# EAGLE board Qwiic_High_Performance_Magnetometer-Panel (EAGLE 9.6.2), part 1 of 3
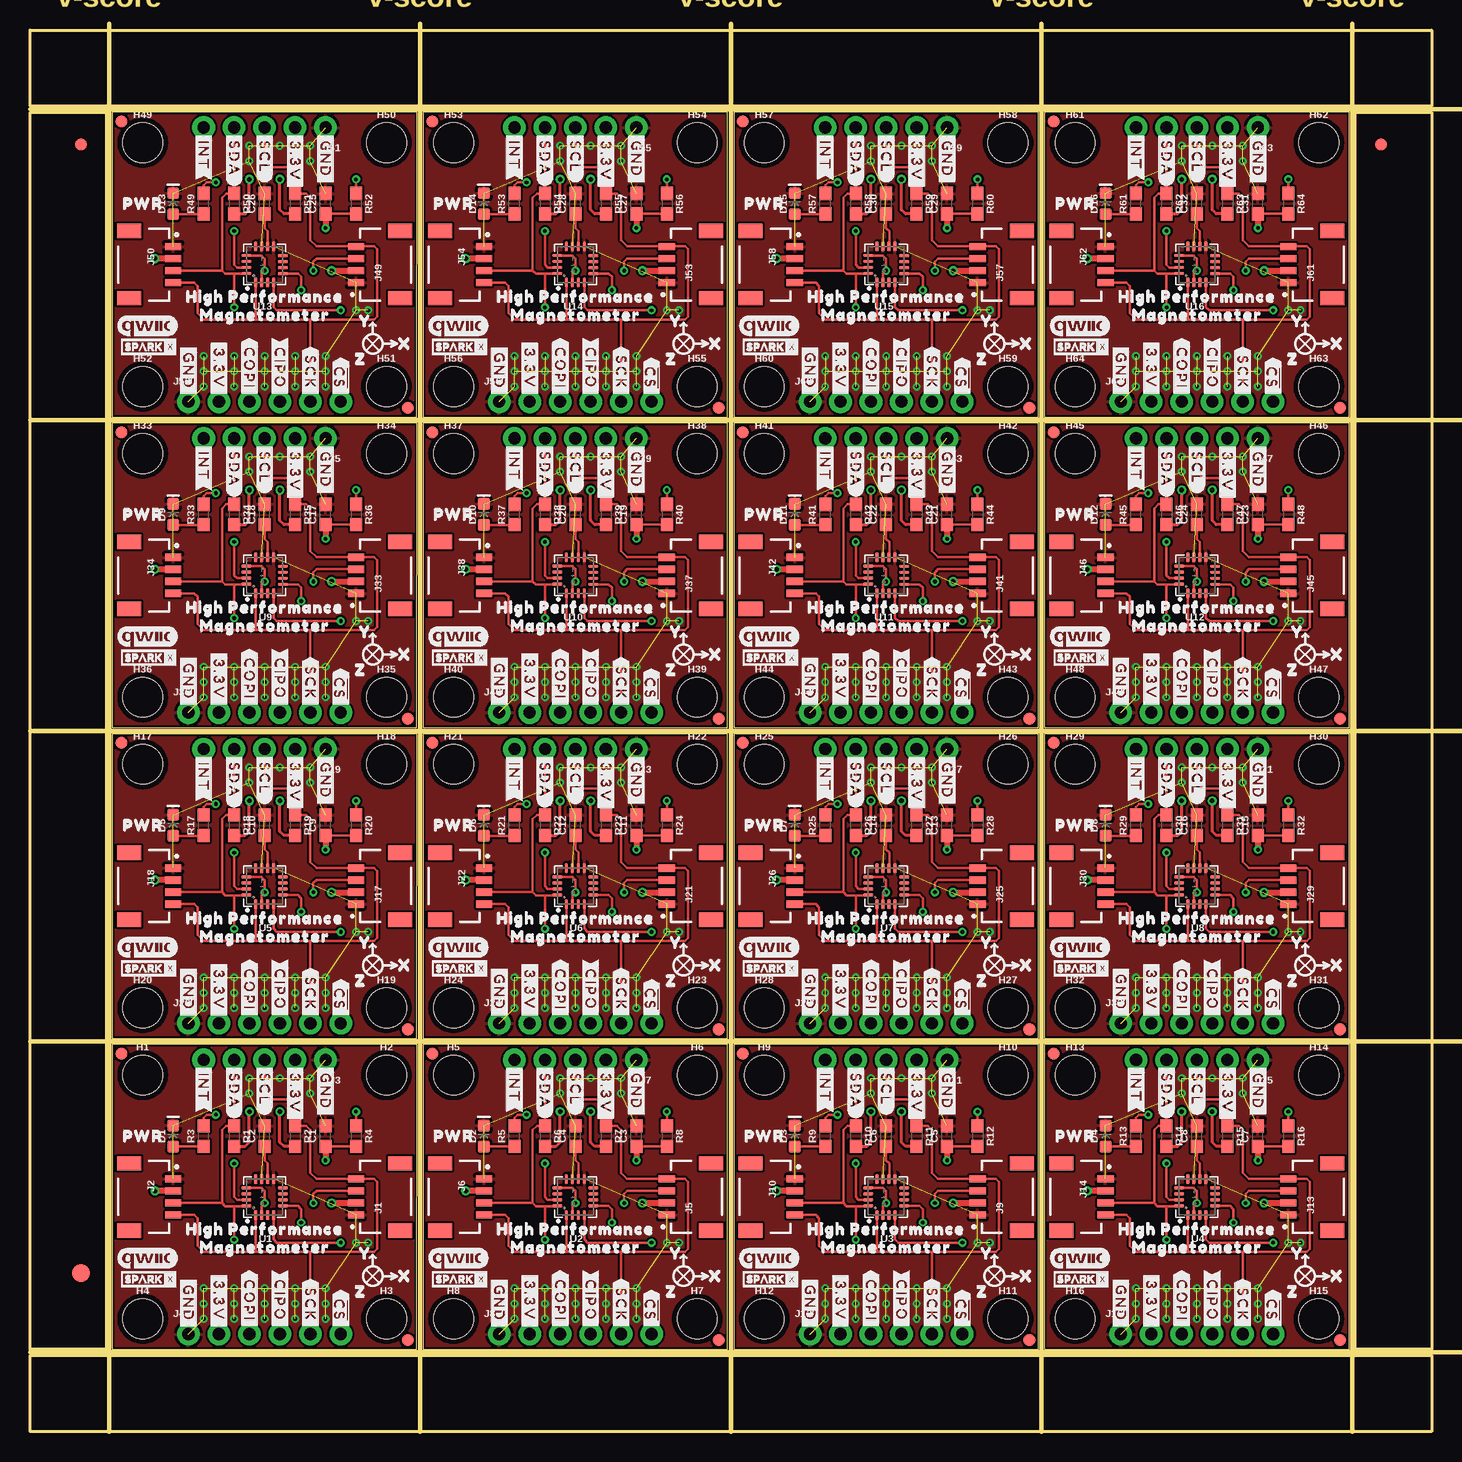
[diagram p0: board, top side]
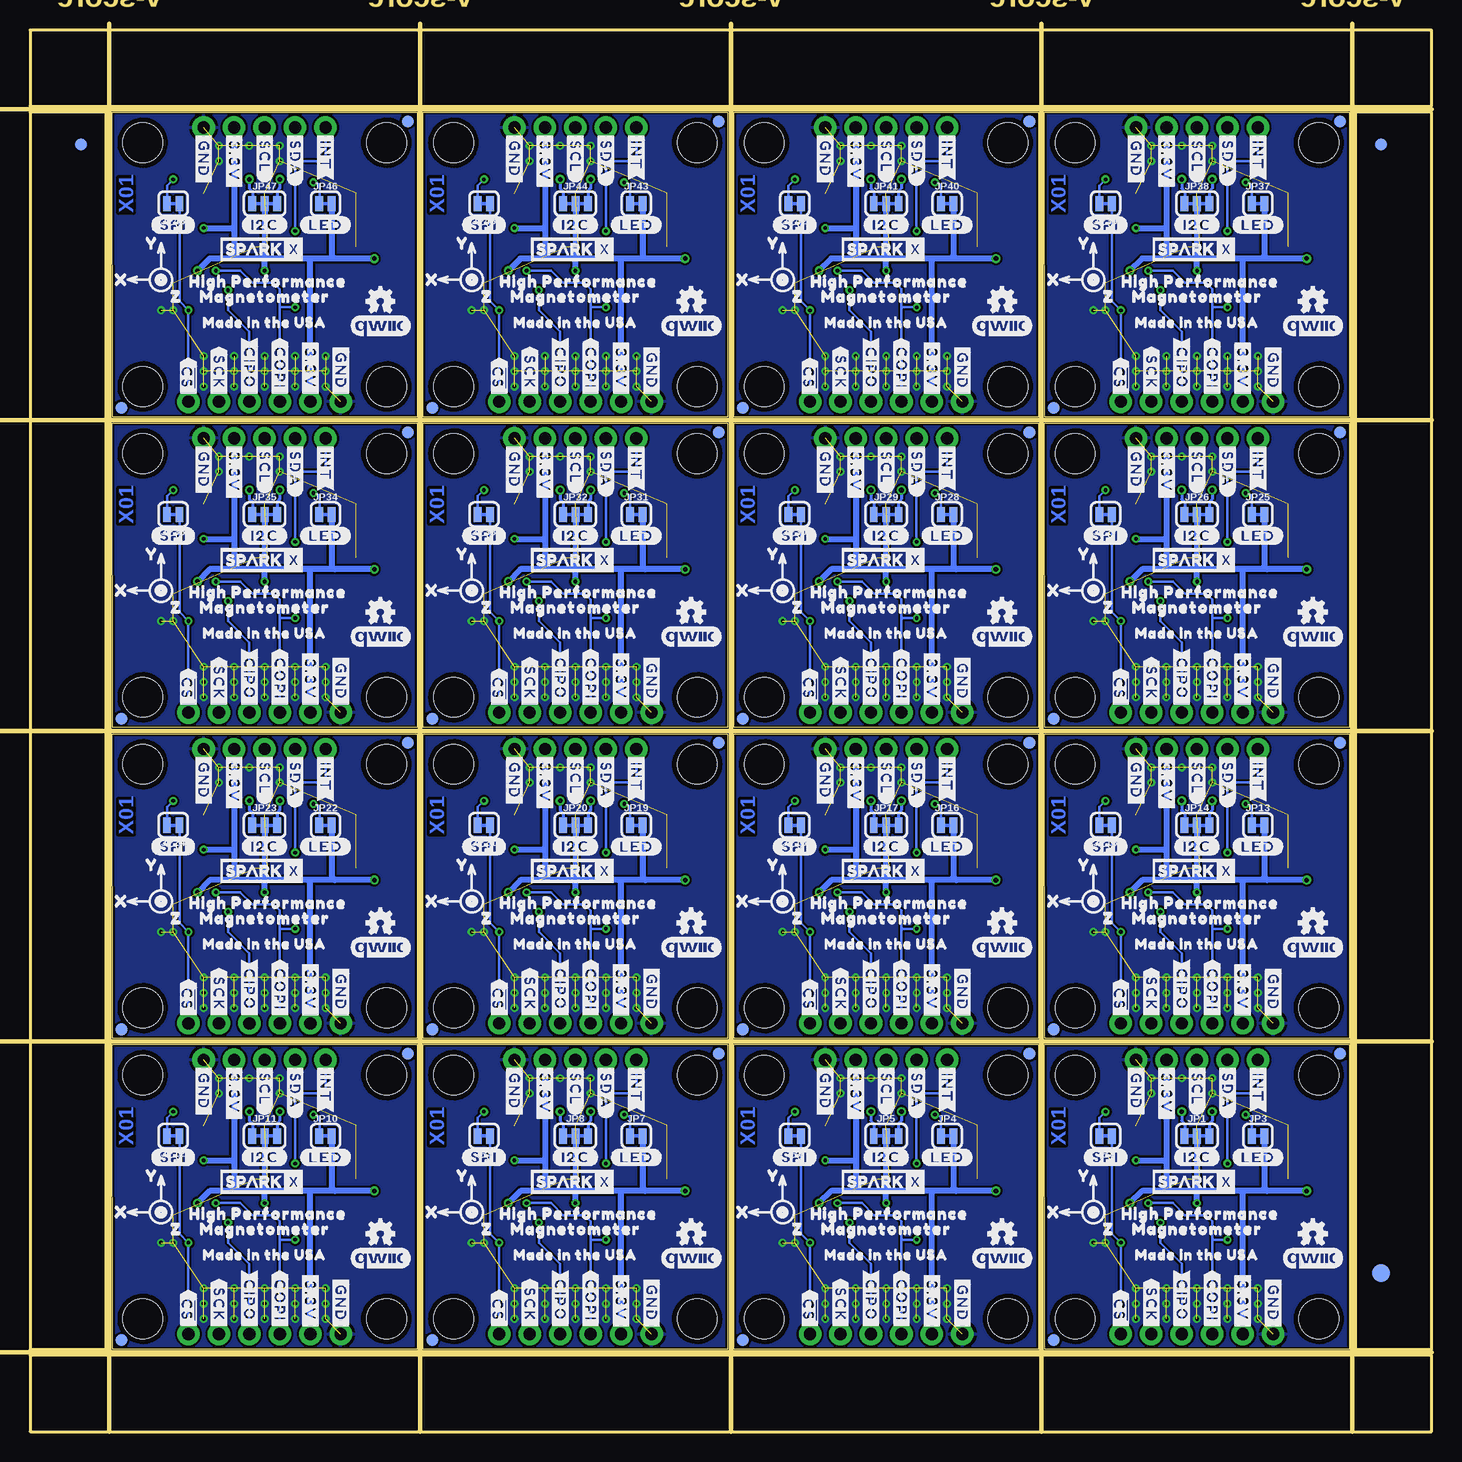
[diagram p1: board, bottom side, seen from below]

Size 116.84 x 116.84 mm. Coordinates in mm from the lower left corner, seen from the top.
Outline: 6.86,6.86 32.24,6.86 32.26,32.26 6.86,32.26 6.86,6.86
Outline: 32.77,6.86 58.15,6.86 58.17,32.26 32.77,32.26 32.77,6.86
Outline: 58.67,6.86 84.05,6.86 84.07,32.26 58.67,32.26 58.67,6.86
Outline: 84.58,6.86 109.96,6.86 109.98,32.26 84.58,32.26 84.58,6.86
Outline: 6.86,32.77 32.24,32.77 32.26,58.17 6.86,58.17 6.86,32.77
Outline: 32.77,32.77 58.15,32.77 58.17,58.17 32.77,58.17 32.77,32.77
Outline: 58.67,32.77 84.05,32.77 84.07,58.17 58.67,58.17 58.67,32.77
Outline: 84.58,32.77 109.96,32.77 109.98,58.17 84.58,58.17 84.58,32.77
Outline: 6.86,58.67 32.24,58.67 32.26,84.07 6.86,84.07 6.86,58.67
Outline: 32.77,58.67 58.15,58.67 58.17,84.07 32.77,84.07 32.77,58.67
Outline: 58.67,58.67 84.05,58.67 84.07,84.07 58.67,84.07 58.67,58.67
Outline: 84.58,58.67 109.96,58.67 109.98,84.07 84.58,84.07 84.58,58.67
Outline: 6.86,84.58 32.24,84.58 32.26,109.98 6.86,109.98 6.86,84.58
Outline: 32.77,84.58 58.15,84.58 58.17,109.98 32.77,109.98 32.77,84.58
Outline: 58.67,84.58 84.05,84.58 84.07,109.98 58.67,109.98 58.67,84.58
Outline: 84.58,84.58 109.96,84.58 109.98,109.98 84.58,109.98 84.58,84.58
Outline: 0,6.35 116.84,6.35 116.84,0 0,0 0,6.35
Outline: 110.49,109.98 116.84,109.98 116.84,6.86 110.49,6.86 110.49,109.98
Outline: 0,116.84 116.84,116.84 116.84,110.49 0,110.49 0,116.84
Outline: 0,109.98 6.35,109.98 6.35,6.86 0,6.86 0,109.98
Copper layers (1*16): Top 0.035mm / dielectric 1.5mm / Bottom 0.035mm
Design rules "Qwiic_High_Performance_Magnetometer": minimum track width 7mil, minimum drill 0.3mm, track to track 7mil, track to pad 7mil, pad to pad 7mil, via to via 7mil, smd to smd 7mil, copper to edge 7mil, drill to drill 7mil, minimum pad ring 7mil, minimum via ring 7mil, stop-mask expansion 4mil, vias tented up to drill 25mil, thermal gap 10mil
Milling: 10 lines

## Footprints (pad centres in the part's own frame; a part is rotated, then mirrored left to right if it is on the bottom)
0603 = smd 1.1 x 1: 1 -0.85,0; 2 0.85,0
LED-0603 = smd 1 x 1: A -0.877,0; C 0.877,0
FIDUCIAL-1X2 = smd 1 x 1: 1 0,0
FIDUCIAL-1.5X3 = smd 1.5 x 1.5: 1 0,0
STAND-OFF = hole 3.302: 0,0
JST04_1MM_RA = smd 0.6 x 1.35: 1 -1.5,0; 2 -0.5,0; 3 0.5,0; 4 1.5,0 | smd 1.2 x 2: NC1 2.8,-3.675; NC2 -2.8,-3.675
1X05_NO_SILK = drill 1.016 pad 1.88: 1 0,0; 2 2.54,0; 3 5.08,0; 4 7.62,0; 5 10.16,0
1X06_NO_SILK = drill 1.016 pad 1.88: 1 0,0; 2 2.54,0; 3 5.08,0; 4 7.62,0; 5 10.16,0; 6 12.7,0
SMT-JUMPER_3_2-NC_TRACE_SILK = smd 0.66 x 1.27: 1 -1.041,0; 2 0,0; 3 1.041,0
SMT-JUMPER_2_NC_TRACE_SILK = smd 0.66 x 1.27: 1 -0.521,0; 2 0.521,0
LGA-16-3X3MM-4X4PINS = smd 0.3 x 0.85: 1 0.754,1.498; 2 0.254,1.498; 3 -0.246,1.498; 4 -0.746,1.498; 9 -0.746,-1.506; 10 -0.246,-1.506; 11 0.254,-1.506; 12 0.754,-1.506 | smd 0.85 x 0.3: 5 -1.508,0.746; 6 -1.508,0.246; 7 -1.508,-0.254; 8 -1.508,-0.754; 13 1.496,-0.764; 14 1.496,-0.264; 15 1.496,0.236; 16 1.496,0.736

## Placement (x,y rotation side)
C1  0.1uF  [0603]  24.64,24.64 90 top
C2  10uF  [0603]  19.56,24.64 90 top
C3  0.1uF  [0603]  50.55,24.64 90 top
C4  10uF  [0603]  45.47,24.64 90 top
C5  0.1uF  [0603]  76.45,24.64 90 top
C6  10uF  [0603]  71.37,24.64 90 top
C7  0.1uF  [0603]  102.36,24.64 90 top
C8  10uF  [0603]  97.28,24.64 90 top
C9  0.1uF  [0603]  24.64,50.55 90 top
C10  10uF  [0603]  19.56,50.55 90 top
C11  0.1uF  [0603]  50.55,50.55 90 top
C12  10uF  [0603]  45.47,50.55 90 top
C13  0.1uF  [0603]  76.45,50.55 90 top
C14  10uF  [0603]  71.37,50.55 90 top
C15  0.1uF  [0603]  102.36,50.55 90 top
C16  10uF  [0603]  97.28,50.55 90 top
C17  0.1uF  [0603]  24.64,76.45 90 top
C18  10uF  [0603]  19.56,76.45 90 top
C19  0.1uF  [0603]  50.55,76.45 90 top
C20  10uF  [0603]  45.47,76.45 90 top
C21  0.1uF  [0603]  76.45,76.45 90 top
C22  10uF  [0603]  71.37,76.45 90 top
C23  0.1uF  [0603]  102.36,76.45 90 top
C24  10uF  [0603]  97.28,76.45 90 top
C25  0.1uF  [0603]  24.64,102.36 90 top
C26  10uF  [0603]  19.56,102.36 90 top
C27  0.1uF  [0603]  50.55,102.36 90 top
C28  10uF  [0603]  45.47,102.36 90 top
C29  0.1uF  [0603]  76.45,102.36 90 top
C30  10uF  [0603]  71.37,102.36 90 top
C31  0.1uF  [0603]  102.36,102.36 90 top
C32  10uF  [0603]  97.28,102.36 90 top
D1  RED  [LED-0603]  11.94,24.64 90 top
D2  RED  [LED-0603]  37.85,24.64 90 top
D3  RED  [LED-0603]  63.75,24.64 90 top
D4  RED  [LED-0603]  89.66,24.64 90 top
D5  RED  [LED-0603]  11.94,50.55 90 top
D6  RED  [LED-0603]  37.85,50.55 90 top
D7  RED  [LED-0603]  63.75,50.55 90 top
D8  RED  [LED-0603]  89.66,50.55 90 top
D9  RED  [LED-0603]  11.94,76.45 90 top
D10  RED  [LED-0603]  37.85,76.45 90 top
D11  RED  [LED-0603]  63.75,76.45 90 top
D12  RED  [LED-0603]  89.66,76.45 90 top
D13  RED  [LED-0603]  11.94,102.36 90 top
D14  RED  [LED-0603]  37.85,102.36 90 top
D15  RED  [LED-0603]  63.75,102.36 90 top
D16  RED  [LED-0603]  89.66,102.36 90 top
E$1  [FIDUCIAL-1X2]  4.23,107.31 0 top
E$2  [FIDUCIAL-1X2]  4.23,107.31 0 bottom
E$3  [FIDUCIAL-1X2]  112.61,107.31 0 top
E$4  [FIDUCIAL-1X2]  112.61,107.31 0 bottom
E$5  [FIDUCIAL-1.5X3]  4.23,13.21 0 top
E$6  [FIDUCIAL-1.5X3]  4.23,13.21 0 bottom
FD1  FIDUCIAL1X2  [FIDUCIAL-1X2]  31.5,7.62 0 top
FD2  FIDUCIAL1X2  [FIDUCIAL-1X2]  7.62,31.5 0 top
FD3  FIDUCIAL1X2  [FIDUCIAL-1X2]  7.62,31.5 0 bottom
FD4  FIDUCIAL1X2  [FIDUCIAL-1X2]  31.5,7.62 0 bottom
FD5  FIDUCIAL1X2  [FIDUCIAL-1X2]  57.4,7.62 0 top
FD6  FIDUCIAL1X2  [FIDUCIAL-1X2]  33.53,31.5 0 top
FD7  FIDUCIAL1X2  [FIDUCIAL-1X2]  33.53,31.5 0 bottom
FD8  FIDUCIAL1X2  [FIDUCIAL-1X2]  57.4,7.62 0 bottom
FD9  FIDUCIAL1X2  [FIDUCIAL-1X2]  83.31,7.62 0 top
FD10  FIDUCIAL1X2  [FIDUCIAL-1X2]  59.44,31.5 0 top
FD11  FIDUCIAL1X2  [FIDUCIAL-1X2]  59.44,31.5 0 bottom
FD12  FIDUCIAL1X2  [FIDUCIAL-1X2]  83.31,7.62 0 bottom
FD13  FIDUCIAL1X2  [FIDUCIAL-1X2]  109.22,7.62 0 top
FD14  FIDUCIAL1X2  [FIDUCIAL-1X2]  85.34,31.5 0 top
FD15  FIDUCIAL1X2  [FIDUCIAL-1X2]  85.34,31.5 0 bottom
FD16  FIDUCIAL1X2  [FIDUCIAL-1X2]  109.22,7.62 0 bottom
FD17  FIDUCIAL1X2  [FIDUCIAL-1X2]  31.5,33.53 0 top
FD18  FIDUCIAL1X2  [FIDUCIAL-1X2]  7.62,57.4 0 top
FD19  FIDUCIAL1X2  [FIDUCIAL-1X2]  7.62,57.4 0 bottom
FD20  FIDUCIAL1X2  [FIDUCIAL-1X2]  31.5,33.53 0 bottom
FD21  FIDUCIAL1X2  [FIDUCIAL-1X2]  57.4,33.53 0 top
FD22  FIDUCIAL1X2  [FIDUCIAL-1X2]  33.53,57.4 0 top
FD23  FIDUCIAL1X2  [FIDUCIAL-1X2]  33.53,57.4 0 bottom
FD24  FIDUCIAL1X2  [FIDUCIAL-1X2]  57.4,33.53 0 bottom
FD25  FIDUCIAL1X2  [FIDUCIAL-1X2]  83.31,33.53 0 top
FD26  FIDUCIAL1X2  [FIDUCIAL-1X2]  59.44,57.4 0 top
FD27  FIDUCIAL1X2  [FIDUCIAL-1X2]  59.44,57.4 0 bottom
FD28  FIDUCIAL1X2  [FIDUCIAL-1X2]  83.31,33.53 0 bottom
FD29  FIDUCIAL1X2  [FIDUCIAL-1X2]  109.22,33.53 0 top
FD30  FIDUCIAL1X2  [FIDUCIAL-1X2]  85.34,57.4 0 top
FD31  FIDUCIAL1X2  [FIDUCIAL-1X2]  85.34,57.4 0 bottom
FD32  FIDUCIAL1X2  [FIDUCIAL-1X2]  109.22,33.53 0 bottom
FD33  FIDUCIAL1X2  [FIDUCIAL-1X2]  31.5,59.44 0 top
FD34  FIDUCIAL1X2  [FIDUCIAL-1X2]  7.62,83.31 0 top
FD35  FIDUCIAL1X2  [FIDUCIAL-1X2]  7.62,83.31 0 bottom
FD36  FIDUCIAL1X2  [FIDUCIAL-1X2]  31.5,59.44 0 bottom
FD37  FIDUCIAL1X2  [FIDUCIAL-1X2]  57.4,59.44 0 top
FD38  FIDUCIAL1X2  [FIDUCIAL-1X2]  33.53,83.31 0 top
FD39  FIDUCIAL1X2  [FIDUCIAL-1X2]  33.53,83.31 0 bottom
FD40  FIDUCIAL1X2  [FIDUCIAL-1X2]  57.4,59.44 0 bottom
FD41  FIDUCIAL1X2  [FIDUCIAL-1X2]  83.31,59.44 0 top
FD42  FIDUCIAL1X2  [FIDUCIAL-1X2]  59.44,83.31 0 top
FD43  FIDUCIAL1X2  [FIDUCIAL-1X2]  59.44,83.31 0 bottom
FD44  FIDUCIAL1X2  [FIDUCIAL-1X2]  83.31,59.44 0 bottom
FD45  FIDUCIAL1X2  [FIDUCIAL-1X2]  109.22,59.44 0 top
FD46  FIDUCIAL1X2  [FIDUCIAL-1X2]  85.34,83.31 0 top
FD47  FIDUCIAL1X2  [FIDUCIAL-1X2]  85.34,83.31 0 bottom
FD48  FIDUCIAL1X2  [FIDUCIAL-1X2]  109.22,59.44 0 bottom
FD49  FIDUCIAL1X2  [FIDUCIAL-1X2]  31.5,85.34 0 top
FD50  FIDUCIAL1X2  [FIDUCIAL-1X2]  7.62,109.22 0 top
FD51  FIDUCIAL1X2  [FIDUCIAL-1X2]  7.62,109.22 0 bottom
FD52  FIDUCIAL1X2  [FIDUCIAL-1X2]  31.5,85.34 0 bottom
FD53  FIDUCIAL1X2  [FIDUCIAL-1X2]  57.4,85.34 0 top
FD54  FIDUCIAL1X2  [FIDUCIAL-1X2]  33.53,109.22 0 top
FD55  FIDUCIAL1X2  [FIDUCIAL-1X2]  33.53,109.22 0 bottom
FD56  FIDUCIAL1X2  [FIDUCIAL-1X2]  57.4,85.34 0 bottom
FD57  FIDUCIAL1X2  [FIDUCIAL-1X2]  83.31,85.34 0 top
FD58  FIDUCIAL1X2  [FIDUCIAL-1X2]  59.44,109.22 0 top
FD59  FIDUCIAL1X2  [FIDUCIAL-1X2]  59.44,109.22 0 bottom
FD60  FIDUCIAL1X2  [FIDUCIAL-1X2]  83.31,85.34 0 bottom
FD61  FIDUCIAL1X2  [FIDUCIAL-1X2]  109.22,85.34 0 top
FD62  FIDUCIAL1X2  [FIDUCIAL-1X2]  85.34,109.22 0 top
FD63  FIDUCIAL1X2  [FIDUCIAL-1X2]  85.34,109.22 0 bottom
FD64  FIDUCIAL1X2  [FIDUCIAL-1X2]  109.22,85.34 0 bottom
FRAME1  FRAME-LETTERNO_PACKAGE  [DUMMY]  6.86,6.86 0 top
FRAME2  FRAME-LETTERNO_PACKAGE  [DUMMY]  32.77,6.86 0 top
FRAME3  FRAME-LETTERNO_PACKAGE  [DUMMY]  58.67,6.86 0 top
FRAME4  FRAME-LETTERNO_PACKAGE  [DUMMY]  84.58,6.86 0 top
FRAME5  FRAME-LETTERNO_PACKAGE  [DUMMY]  6.86,32.77 0 top
FRAME6  FRAME-LETTERNO_PACKAGE  [DUMMY]  32.77,32.77 0 top
FRAME7  FRAME-LETTERNO_PACKAGE  [DUMMY]  58.67,32.77 0 top
FRAME8  FRAME-LETTERNO_PACKAGE  [DUMMY]  84.58,32.77 0 top
FRAME9  FRAME-LETTERNO_PACKAGE  [DUMMY]  6.86,58.67 0 top
FRAME10  FRAME-LETTERNO_PACKAGE  [DUMMY]  32.77,58.67 0 top
FRAME11  FRAME-LETTERNO_PACKAGE  [DUMMY]  58.67,58.67 0 top
FRAME12  FRAME-LETTERNO_PACKAGE  [DUMMY]  84.58,58.67 0 top
FRAME13  FRAME-LETTERNO_PACKAGE  [DUMMY]  6.86,84.58 0 top
FRAME14  FRAME-LETTERNO_PACKAGE  [DUMMY]  32.77,84.58 0 top
FRAME15  FRAME-LETTERNO_PACKAGE  [DUMMY]  58.67,84.58 0 top
FRAME16  FRAME-LETTERNO_PACKAGE  [DUMMY]  84.58,84.58 0 top
H1  STAND-OFF  [STAND-OFF]  9.4,29.72 0 top
H2  STAND-OFF  [STAND-OFF]  29.72,29.72 0 top
H3  STAND-OFF  [STAND-OFF]  29.72,9.4 0 top
H4  STAND-OFF  [STAND-OFF]  9.4,9.4 0 top
H5  STAND-OFF  [STAND-OFF]  35.31,29.72 0 top
H6  STAND-OFF  [STAND-OFF]  55.63,29.72 0 top
H7  STAND-OFF  [STAND-OFF]  55.63,9.4 0 top
H8  STAND-OFF  [STAND-OFF]  35.31,9.4 0 top
H9  STAND-OFF  [STAND-OFF]  61.21,29.72 0 top
H10  STAND-OFF  [STAND-OFF]  81.53,29.72 0 top
H11  STAND-OFF  [STAND-OFF]  81.53,9.4 0 top
H12  STAND-OFF  [STAND-OFF]  61.21,9.4 0 top
H13  STAND-OFF  [STAND-OFF]  87.12,29.72 0 top
H14  STAND-OFF  [STAND-OFF]  107.44,29.72 0 top
H15  STAND-OFF  [STAND-OFF]  107.44,9.4 0 top
H16  STAND-OFF  [STAND-OFF]  87.12,9.4 0 top
H17  STAND-OFF  [STAND-OFF]  9.4,55.63 0 top
H18  STAND-OFF  [STAND-OFF]  29.72,55.63 0 top
H19  STAND-OFF  [STAND-OFF]  29.72,35.31 0 top
H20  STAND-OFF  [STAND-OFF]  9.4,35.31 0 top
H21  STAND-OFF  [STAND-OFF]  35.31,55.63 0 top
H22  STAND-OFF  [STAND-OFF]  55.63,55.63 0 top
H23  STAND-OFF  [STAND-OFF]  55.63,35.31 0 top
H24  STAND-OFF  [STAND-OFF]  35.31,35.31 0 top
H25  STAND-OFF  [STAND-OFF]  61.21,55.63 0 top
H26  STAND-OFF  [STAND-OFF]  81.53,55.63 0 top
H27  STAND-OFF  [STAND-OFF]  81.53,35.31 0 top
H28  STAND-OFF  [STAND-OFF]  61.21,35.31 0 top
H29  STAND-OFF  [STAND-OFF]  87.12,55.63 0 top
H30  STAND-OFF  [STAND-OFF]  107.44,55.63 0 top
H31  STAND-OFF  [STAND-OFF]  107.44,35.31 0 top
H32  STAND-OFF  [STAND-OFF]  87.12,35.31 0 top
H33  STAND-OFF  [STAND-OFF]  9.4,81.53 0 top
H34  STAND-OFF  [STAND-OFF]  29.72,81.53 0 top
H35  STAND-OFF  [STAND-OFF]  29.72,61.21 0 top
H36  STAND-OFF  [STAND-OFF]  9.4,61.21 0 top
H37  STAND-OFF  [STAND-OFF]  35.31,81.53 0 top
H38  STAND-OFF  [STAND-OFF]  55.63,81.53 0 top
H39  STAND-OFF  [STAND-OFF]  55.63,61.21 0 top
H40  STAND-OFF  [STAND-OFF]  35.31,61.21 0 top
H41  STAND-OFF  [STAND-OFF]  61.21,81.53 0 top
H42  STAND-OFF  [STAND-OFF]  81.53,81.53 0 top
H43  STAND-OFF  [STAND-OFF]  81.53,61.21 0 top
H44  STAND-OFF  [STAND-OFF]  61.21,61.21 0 top
H45  STAND-OFF  [STAND-OFF]  87.12,81.53 0 top
H46  STAND-OFF  [STAND-OFF]  107.44,81.53 0 top
H47  STAND-OFF  [STAND-OFF]  107.44,61.21 0 top
H48  STAND-OFF  [STAND-OFF]  87.12,61.21 0 top
H49  STAND-OFF  [STAND-OFF]  9.4,107.44 0 top
H50  STAND-OFF  [STAND-OFF]  29.72,107.44 0 top
H51  STAND-OFF  [STAND-OFF]  29.72,87.12 0 top
H52  STAND-OFF  [STAND-OFF]  9.4,87.12 0 top
H53  STAND-OFF  [STAND-OFF]  35.31,107.44 0 top
H54  STAND-OFF  [STAND-OFF]  55.63,107.44 0 top
H55  STAND-OFF  [STAND-OFF]  55.63,87.12 0 top
H56  STAND-OFF  [STAND-OFF]  35.31,87.12 0 top
H57  STAND-OFF  [STAND-OFF]  61.21,107.44 0 top
H58  STAND-OFF  [STAND-OFF]  81.53,107.44 0 top
H59  STAND-OFF  [STAND-OFF]  81.53,87.12 0 top
H60  STAND-OFF  [STAND-OFF]  61.21,87.12 0 top
H61  STAND-OFF  [STAND-OFF]  87.12,107.44 0 top
H62  STAND-OFF  [STAND-OFF]  107.44,107.44 0 top
H63  STAND-OFF  [STAND-OFF]  107.44,87.12 0 top
H64  STAND-OFF  [STAND-OFF]  87.12,87.12 0 top
J1  Qwiic  [JST04_1MM_RA]  27.18,19.56 90 top
J2  Qwiic  [JST04_1MM_RA]  11.94,19.56 270 top
J3  [1X05_NO_SILK]  24.64,30.99 180 top
J4  [1X06_NO_SILK]  13.21,8.13 0 top
J5  Qwiic  [JST04_1MM_RA]  53.09,19.56 90 top
J6  Qwiic  [JST04_1MM_RA]  37.85,19.56 270 top
J7  [1X05_NO_SILK]  50.55,30.99 180 top
J8  [1X06_NO_SILK]  39.12,8.13 0 top
J9  Qwiic  [JST04_1MM_RA]  78.99,19.56 90 top
J10  Qwiic  [JST04_1MM_RA]  63.75,19.56 270 top
J11  [1X05_NO_SILK]  76.45,30.99 180 top
J12  [1X06_NO_SILK]  65.02,8.13 0 top
J13  Qwiic  [JST04_1MM_RA]  104.9,19.56 90 top
J14  Qwiic  [JST04_1MM_RA]  89.66,19.56 270 top
J15  [1X05_NO_SILK]  102.36,30.99 180 top
J16  [1X06_NO_SILK]  90.93,8.13 0 top
J17  Qwiic  [JST04_1MM_RA]  27.18,45.47 90 top
J18  Qwiic  [JST04_1MM_RA]  11.94,45.47 270 top
J19  [1X05_NO_SILK]  24.64,56.9 180 top
J20  [1X06_NO_SILK]  13.21,34.04 0 top
J21  Qwiic  [JST04_1MM_RA]  53.09,45.47 90 top
J22  Qwiic  [JST04_1MM_RA]  37.85,45.47 270 top
J23  [1X05_NO_SILK]  50.55,56.9 180 top
J24  [1X06_NO_SILK]  39.12,34.04 0 top
J25  Qwiic  [JST04_1MM_RA]  78.99,45.47 90 top
J26  Qwiic  [JST04_1MM_RA]  63.75,45.47 270 top
J27  [1X05_NO_SILK]  76.45,56.9 180 top
J28  [1X06_NO_SILK]  65.02,34.04 0 top
J29  Qwiic  [JST04_1MM_RA]  104.9,45.47 90 top
J30  Qwiic  [JST04_1MM_RA]  89.66,45.47 270 top
J31  [1X05_NO_SILK]  102.36,56.9 180 top
J32  [1X06_NO_SILK]  90.93,34.04 0 top
J33  Qwiic  [JST04_1MM_RA]  27.18,71.37 90 top
J34  Qwiic  [JST04_1MM_RA]  11.94,71.37 270 top
J35  [1X05_NO_SILK]  24.64,82.8 180 top
J36  [1X06_NO_SILK]  13.21,59.94 0 top
J37  Qwiic  [JST04_1MM_RA]  53.09,71.37 90 top
J38  Qwiic  [JST04_1MM_RA]  37.85,71.37 270 top
J39  [1X05_NO_SILK]  50.55,82.8 180 top
J40  [1X06_NO_SILK]  39.12,59.94 0 top
J41  Qwiic  [JST04_1MM_RA]  78.99,71.37 90 top
J42  Qwiic  [JST04_1MM_RA]  63.75,71.37 270 top
J43  [1X05_NO_SILK]  76.45,82.8 180 top
J44  [1X06_NO_SILK]  65.02,59.94 0 top
J45  Qwiic  [JST04_1MM_RA]  104.9,71.37 90 top
J46  Qwiic  [JST04_1MM_RA]  89.66,71.37 270 top
J47  [1X05_NO_SILK]  102.36,82.8 180 top
J48  [1X06_NO_SILK]  90.93,59.94 0 top
J49  Qwiic  [JST04_1MM_RA]  27.18,97.28 90 top
J50  Qwiic  [JST04_1MM_RA]  11.94,97.28 270 top
J51  [1X05_NO_SILK]  24.64,108.71 180 top
J52  [1X06_NO_SILK]  13.21,85.85 0 top
J53  Qwiic  [JST04_1MM_RA]  53.09,97.28 90 top
J54  Qwiic  [JST04_1MM_RA]  37.85,97.28 270 top
J55  [1X05_NO_SILK]  50.55,108.71 180 top
J56  [1X06_NO_SILK]  39.12,85.85 0 top
J57  Qwiic  [JST04_1MM_RA]  78.99,97.28 90 top
J58  Qwiic  [JST04_1MM_RA]  63.75,97.28 270 top
J59  [1X05_NO_SILK]  76.45,108.71 180 top
J60  [1X06_NO_SILK]  65.02,85.85 0 top
J61  Qwiic  [JST04_1MM_RA]  104.9,97.28 90 top
J62  Qwiic  [JST04_1MM_RA]  89.66,97.28 270 top
J63  [1X05_NO_SILK]  102.36,108.71 180 top
J64  [1X06_NO_SILK]  90.93,85.85 0 top
JP1  JUMPER-SMT_3_2-NC_TRACE_SILK  [SMT-JUMPER_3_2-NC_TRACE_SILK]  19.56,24.64 0 bottom
JP2  JUMPER-SMT_2_NC_TRACE_SILK  [SMT-JUMPER_2_NC_TRACE_SILK]  27.18,24.64 180 bottom
JP3  JUMPER-SMT_2_NC_TRACE_SILK  [SMT-JUMPER_2_NC_TRACE_SILK]  14.48,24.64 0 bottom
JP4  JUMPER-SMT_2_NC_TRACE_SILK  [SMT-JUMPER_2_NC_TRACE_SILK]  40.39,24.64 0 bottom
JP5  JUMPER-SMT_3_2-NC_TRACE_SILK  [SMT-JUMPER_3_2-NC_TRACE_SILK]  45.47,24.64 0 bottom
JP6  JUMPER-SMT_2_NC_TRACE_SILK  [SMT-JUMPER_2_NC_TRACE_SILK]  53.09,24.64 180 bottom
JP7  JUMPER-SMT_2_NC_TRACE_SILK  [SMT-JUMPER_2_NC_TRACE_SILK]  66.29,24.64 0 bottom
JP8  JUMPER-SMT_3_2-NC_TRACE_SILK  [SMT-JUMPER_3_2-NC_TRACE_SILK]  71.37,24.64 0 bottom
JP9  JUMPER-SMT_2_NC_TRACE_SILK  [SMT-JUMPER_2_NC_TRACE_SILK]  78.99,24.64 180 bottom
JP10  JUMPER-SMT_2_NC_TRACE_SILK  [SMT-JUMPER_2_NC_TRACE_SILK]  92.2,24.64 0 bottom
JP11  JUMPER-SMT_3_2-NC_TRACE_SILK  [SMT-JUMPER_3_2-NC_TRACE_SILK]  97.28,24.64 0 bottom
JP12  JUMPER-SMT_2_NC_TRACE_SILK  [SMT-JUMPER_2_NC_TRACE_SILK]  104.9,24.64 180 bottom
JP13  JUMPER-SMT_2_NC_TRACE_SILK  [SMT-JUMPER_2_NC_TRACE_SILK]  14.48,50.55 0 bottom
JP14  JUMPER-SMT_3_2-NC_TRACE_SILK  [SMT-JUMPER_3_2-NC_TRACE_SILK]  19.56,50.55 0 bottom
JP15  JUMPER-SMT_2_NC_TRACE_SILK  [SMT-JUMPER_2_NC_TRACE_SILK]  27.18,50.55 180 bottom
JP16  JUMPER-SMT_2_NC_TRACE_SILK  [SMT-JUMPER_2_NC_TRACE_SILK]  40.39,50.55 0 bottom
JP17  JUMPER-SMT_3_2-NC_TRACE_SILK  [SMT-JUMPER_3_2-NC_TRACE_SILK]  45.47,50.55 0 bottom
JP18  JUMPER-SMT_2_NC_TRACE_SILK  [SMT-JUMPER_2_NC_TRACE_SILK]  53.09,50.55 180 bottom
JP19  JUMPER-SMT_2_NC_TRACE_SILK  [SMT-JUMPER_2_NC_TRACE_SILK]  66.29,50.55 0 bottom
JP20  JUMPER-SMT_3_2-NC_TRACE_SILK  [SMT-JUMPER_3_2-NC_TRACE_SILK]  71.37,50.55 0 bottom
JP21  JUMPER-SMT_2_NC_TRACE_SILK  [SMT-JUMPER_2_NC_TRACE_SILK]  78.99,50.55 180 bottom
JP22  JUMPER-SMT_2_NC_TRACE_SILK  [SMT-JUMPER_2_NC_TRACE_SILK]  92.2,50.55 0 bottom
JP23  JUMPER-SMT_3_2-NC_TRACE_SILK  [SMT-JUMPER_3_2-NC_TRACE_SILK]  97.28,50.55 0 bottom
JP24  JUMPER-SMT_2_NC_TRACE_SILK  [SMT-JUMPER_2_NC_TRACE_SILK]  104.9,50.55 180 bottom
JP25  JUMPER-SMT_2_NC_TRACE_SILK  [SMT-JUMPER_2_NC_TRACE_SILK]  14.48,76.45 0 bottom
JP26  JUMPER-SMT_3_2-NC_TRACE_SILK  [SMT-JUMPER_3_2-NC_TRACE_SILK]  19.56,76.45 0 bottom
JP27  JUMPER-SMT_2_NC_TRACE_SILK  [SMT-JUMPER_2_NC_TRACE_SILK]  27.18,76.45 180 bottom
JP28  JUMPER-SMT_2_NC_TRACE_SILK  [SMT-JUMPER_2_NC_TRACE_SILK]  40.39,76.45 0 bottom
JP29  JUMPER-SMT_3_2-NC_TRACE_SILK  [SMT-JUMPER_3_2-NC_TRACE_SILK]  45.47,76.45 0 bottom
JP30  JUMPER-SMT_2_NC_TRACE_SILK  [SMT-JUMPER_2_NC_TRACE_SILK]  53.09,76.45 180 bottom
JP31  JUMPER-SMT_2_NC_TRACE_SILK  [SMT-JUMPER_2_NC_TRACE_SILK]  66.29,76.45 0 bottom
JP32  JUMPER-SMT_3_2-NC_TRACE_SILK  [SMT-JUMPER_3_2-NC_TRACE_SILK]  71.37,76.45 0 bottom
JP33  JUMPER-SMT_2_NC_TRACE_SILK  [SMT-JUMPER_2_NC_TRACE_SILK]  78.99,76.45 180 bottom
JP34  JUMPER-SMT_2_NC_TRACE_SILK  [SMT-JUMPER_2_NC_TRACE_SILK]  92.2,76.45 0 bottom
JP35  JUMPER-SMT_3_2-NC_TRACE_SILK  [SMT-JUMPER_3_2-NC_TRACE_SILK]  97.28,76.45 0 bottom
JP36  JUMPER-SMT_2_NC_TRACE_SILK  [SMT-JUMPER_2_NC_TRACE_SILK]  104.9,76.45 180 bottom
JP37  JUMPER-SMT_2_NC_TRACE_SILK  [SMT-JUMPER_2_NC_TRACE_SILK]  14.48,102.36 0 bottom
JP38  JUMPER-SMT_3_2-NC_TRACE_SILK  [SMT-JUMPER_3_2-NC_TRACE_SILK]  19.56,102.36 0 bottom
JP39  JUMPER-SMT_2_NC_TRACE_SILK  [SMT-JUMPER_2_NC_TRACE_SILK]  27.18,102.36 180 bottom
JP40  JUMPER-SMT_2_NC_TRACE_SILK  [SMT-JUMPER_2_NC_TRACE_SILK]  40.39,102.36 0 bottom
JP41  JUMPER-SMT_3_2-NC_TRACE_SILK  [SMT-JUMPER_3_2-NC_TRACE_SILK]  45.47,102.36 0 bottom
JP42  JUMPER-SMT_2_NC_TRACE_SILK  [SMT-JUMPER_2_NC_TRACE_SILK]  53.09,102.36 180 bottom
JP43  JUMPER-SMT_2_NC_TRACE_SILK  [SMT-JUMPER_2_NC_TRACE_SILK]  66.29,102.36 0 bottom
JP44  JUMPER-SMT_3_2-NC_TRACE_SILK  [SMT-JUMPER_3_2-NC_TRACE_SILK]  71.37,102.36 0 bottom
JP45  JUMPER-SMT_2_NC_TRACE_SILK  [SMT-JUMPER_2_NC_TRACE_SILK]  78.99,102.36 180 bottom
JP46  JUMPER-SMT_2_NC_TRACE_SILK  [SMT-JUMPER_2_NC_TRACE_SILK]  92.2,102.36 0 bottom
JP47  JUMPER-SMT_3_2-NC_TRACE_SILK  [SMT-JUMPER_3_2-NC_TRACE_SILK]  97.28,102.36 0 bottom
JP48  JUMPER-SMT_2_NC_TRACE_SILK  [SMT-JUMPER_2_NC_TRACE_SILK]  104.9,102.36 180 bottom
LOGO1  OSHW-LOGOMINI  [OSHW-LOGO-MINI]  9.91,16.51 0 bottom
LOGO2  QWIIC_LOGO_5MM  [QWIIC_5MM]  9.91,14.48 0 bottom
LOGO3  QWIIC_LOGO_5MM  [QWIIC_5MM]  9.78,14.48 0 top
LOGO4  OSHW-LOGOMINI  [OSHW-LOGO-MINI]  35.81,16.51 0 bottom
LOGO5  QWIIC_LOGO_5MM  [QWIIC_5MM]  35.81,14.48 0 bottom
LOGO6  QWIIC_LOGO_5MM  [QWIIC_5MM]  35.69,14.48 0 top
LOGO7  OSHW-LOGOMINI  [OSHW-LOGO-MINI]  61.72,16.51 0 bottom
LOGO8  QWIIC_LOGO_5MM  [QWIIC_5MM]  61.72,14.48 0 bottom
LOGO9  QWIIC_LOGO_5MM  [QWIIC_5MM]  61.59,14.48 0 top
LOGO10  OSHW-LOGOMINI  [OSHW-LOGO-MINI]  87.63,16.51 0 bottom
LOGO11  QWIIC_LOGO_5MM  [QWIIC_5MM]  87.63,14.48 0 bottom
LOGO12  QWIIC_LOGO_5MM  [QWIIC_5MM]  87.5,14.48 0 top
LOGO13  OSHW-LOGOMINI  [OSHW-LOGO-MINI]  9.91,42.42 0 bottom
LOGO14  QWIIC_LOGO_5MM  [QWIIC_5MM]  9.91,40.39 0 bottom
LOGO15  QWIIC_LOGO_5MM  [QWIIC_5MM]  9.78,40.39 0 top
LOGO16  OSHW-LOGOMINI  [OSHW-LOGO-MINI]  35.81,42.42 0 bottom
LOGO17  QWIIC_LOGO_5MM  [QWIIC_5MM]  35.81,40.39 0 bottom
LOGO18  QWIIC_LOGO_5MM  [QWIIC_5MM]  35.69,40.39 0 top
LOGO19  OSHW-LOGOMINI  [OSHW-LOGO-MINI]  61.72,42.42 0 bottom
LOGO20  QWIIC_LOGO_5MM  [QWIIC_5MM]  61.72,40.39 0 bottom
LOGO21  QWIIC_LOGO_5MM  [QWIIC_5MM]  61.59,40.39 0 top
LOGO22  OSHW-LOGOMINI  [OSHW-LOGO-MINI]  87.63,42.42 0 bottom
LOGO23  QWIIC_LOGO_5MM  [QWIIC_5MM]  87.63,40.39 0 bottom
LOGO24  QWIIC_LOGO_5MM  [QWIIC_5MM]  87.5,40.39 0 top
LOGO25  OSHW-LOGOMINI  [OSHW-LOGO-MINI]  9.91,68.33 0 bottom
LOGO26  QWIIC_LOGO_5MM  [QWIIC_5MM]  9.91,66.29 0 bottom
LOGO27  QWIIC_LOGO_5MM  [QWIIC_5MM]  9.78,66.29 0 top
LOGO28  OSHW-LOGOMINI  [OSHW-LOGO-MINI]  35.81,68.33 0 bottom
LOGO29  QWIIC_LOGO_5MM  [QWIIC_5MM]  35.81,66.29 0 bottom
LOGO30  QWIIC_LOGO_5MM  [QWIIC_5MM]  35.69,66.29 0 top
LOGO31  OSHW-LOGOMINI  [OSHW-LOGO-MINI]  61.72,68.33 0 bottom
LOGO32  QWIIC_LOGO_5MM  [QWIIC_5MM]  61.72,66.29 0 bottom
LOGO33  QWIIC_LOGO_5MM  [QWIIC_5MM]  61.59,66.29 0 top
LOGO34  OSHW-LOGOMINI  [OSHW-LOGO-MINI]  87.63,68.33 0 bottom
LOGO35  QWIIC_LOGO_5MM  [QWIIC_5MM]  87.63,66.29 0 bottom
LOGO36  QWIIC_LOGO_5MM  [QWIIC_5MM]  87.5,66.29 0 top
LOGO37  OSHW-LOGOMINI  [OSHW-LOGO-MINI]  9.91,94.23 0 bottom
LOGO38  QWIIC_LOGO_5MM  [QWIIC_5MM]  9.91,92.2 0 bottom
LOGO39  QWIIC_LOGO_5MM  [QWIIC_5MM]  9.78,92.2 0 top
LOGO40  OSHW-LOGOMINI  [OSHW-LOGO-MINI]  35.81,94.23 0 bottom
LOGO41  QWIIC_LOGO_5MM  [QWIIC_5MM]  35.81,92.2 0 bottom
LOGO42  QWIIC_LOGO_5MM  [QWIIC_5MM]  35.69,92.2 0 top
LOGO43  OSHW-LOGOMINI  [OSHW-LOGO-MINI]  61.72,94.23 0 bottom
LOGO44  QWIIC_LOGO_5MM  [QWIIC_5MM]  61.72,92.2 0 bottom
LOGO45  QWIIC_LOGO_5MM  [QWIIC_5MM]  61.59,92.2 0 top
LOGO46  OSHW-LOGOMINI  [OSHW-LOGO-MINI]  87.63,94.23 0 bottom
LOGO47  QWIIC_LOGO_5MM  [QWIIC_5MM]  87.63,92.2 0 bottom
LOGO48  QWIIC_LOGO_5MM  [QWIIC_5MM]  87.5,92.2 0 top
R1  2.2k  [0603]  17.02,24.64 270 top
R2  2.2k  [0603]  22.1,24.64 270 top
R3  1k  [0603]  14.48,24.64 90 top
R4  10k  [0603]  27.18,24.64 270 top
R5  1k  [0603]  40.39,24.64 90 top
R6  2.2k  [0603]  42.93,24.64 270 top
R7  2.2k  [0603]  48.01,24.64 270 top
R8  10k  [0603]  53.09,24.64 270 top
R9  1k  [0603]  66.29,24.64 90 top
R10  2.2k  [0603]  68.83,24.64 270 top
R11  2.2k  [0603]  73.91,24.64 270 top
R12  10k  [0603]  78.99,24.64 270 top
R13  1k  [0603]  92.2,24.64 90 top
R14  2.2k  [0603]  94.74,24.64 270 top
R15  2.2k  [0603]  99.82,24.64 270 top
R16  10k  [0603]  104.9,24.64 270 top
R17  1k  [0603]  14.48,50.55 90 top
R18  2.2k  [0603]  17.02,50.55 270 top
R19  2.2k  [0603]  22.1,50.55 270 top
R20  10k  [0603]  27.18,50.55 270 top
R21  1k  [0603]  40.39,50.55 90 top
R22  2.2k  [0603]  42.93,50.55 270 top
R23  2.2k  [0603]  48.01,50.55 270 top
R24  10k  [0603]  53.09,50.55 270 top
R25  1k  [0603]  66.29,50.55 90 top
R26  2.2k  [0603]  68.83,50.55 270 top
R27  2.2k  [0603]  73.91,50.55 270 top
R28  10k  [0603]  78.99,50.55 270 top
R29  1k  [0603]  92.2,50.55 90 top
R30  2.2k  [0603]  94.74,50.55 270 top
R31  2.2k  [0603]  99.82,50.55 270 top
R32  10k  [0603]  104.9,50.55 270 top
R33  1k  [0603]  14.48,76.45 90 top
R34  2.2k  [0603]  17.02,76.45 270 top
R35  2.2k  [0603]  22.1,76.45 270 top
R36  10k  [0603]  27.18,76.45 270 top
R37  1k  [0603]  40.39,76.45 90 top
R38  2.2k  [0603]  42.93,76.45 270 top
R39  2.2k  [0603]  48.01,76.45 270 top
R40  10k  [0603]  53.09,76.45 270 top
R41  1k  [0603]  66.29,76.45 90 top
R42  2.2k  [0603]  68.83,76.45 270 top
R43  2.2k  [0603]  73.91,76.45 270 top
R44  10k  [0603]  78.99,76.45 270 top
R45  1k  [0603]  92.2,76.45 90 top
R46  2.2k  [0603]  94.74,76.45 270 top
R47  2.2k  [0603]  99.82,76.45 270 top
R48  10k  [0603]  104.9,76.45 270 top
R49  1k  [0603]  14.48,102.36 90 top
R50  2.2k  [0603]  17.02,102.36 270 top
R51  2.2k  [0603]  22.1,102.36 270 top
R52  10k  [0603]  27.18,102.36 270 top
R53  1k  [0603]  40.39,102.36 90 top
R54  2.2k  [0603]  42.93,102.36 270 top
R55  2.2k  [0603]  48.01,102.36 270 top
R56  10k  [0603]  53.09,102.36 270 top
R57  1k  [0603]  66.29,102.36 90 top
R58  2.2k  [0603]  68.83,102.36 270 top
R59  2.2k  [0603]  73.91,102.36 270 top
R60  10k  [0603]  78.99,102.36 270 top
R61  1k  [0603]  92.2,102.36 90 top
R62  2.2k  [0603]  94.74,102.36 270 top
R63  2.2k  [0603]  99.82,102.36 270 top
R64  10k  [0603]  104.9,102.36 270 top
U1  MMC5893MA_QFN16  [LGA-16-3X3MM-4X4PINS]  19.56,19.56 180 top
U2  MMC5893MA_QFN16  [LGA-16-3X3MM-4X4PINS]  45.47,19.56 180 top
U3  MMC5893MA_QFN16  [LGA-16-3X3MM-4X4PINS]  71.37,19.56 180 top
U4  MMC5893MA_QFN16  [LGA-16-3X3MM-4X4PINS]  97.28,19.56 180 top
U5  MMC5893MA_QFN16  [LGA-16-3X3MM-4X4PINS]  19.56,45.47 180 top
U6  MMC5893MA_QFN16  [LGA-16-3X3MM-4X4PINS]  45.47,45.47 180 top
U7  MMC5893MA_QFN16  [LGA-16-3X3MM-4X4PINS]  71.37,45.47 180 top
U8  MMC5893MA_QFN16  [LGA-16-3X3MM-4X4PINS]  97.28,45.47 180 top
U9  MMC5893MA_QFN16  [LGA-16-3X3MM-4X4PINS]  19.56,71.37 180 top
U10  MMC5893MA_QFN16  [LGA-16-3X3MM-4X4PINS]  45.47,71.37 180 top
U11  MMC5893MA_QFN16  [LGA-16-3X3MM-4X4PINS]  71.37,71.37 180 top
U12  MMC5893MA_QFN16  [LGA-16-3X3MM-4X4PINS]  97.28,71.37 180 top
U13  MMC5893MA_QFN16  [LGA-16-3X3MM-4X4PINS]  19.56,97.28 180 top
U14  MMC5893MA_QFN16  [LGA-16-3X3MM-4X4PINS]  45.47,97.28 180 top
U15  MMC5893MA_QFN16  [LGA-16-3X3MM-4X4PINS]  71.37,97.28 180 top
U16  MMC5893MA_QFN16  [LGA-16-3X3MM-4X4PINS]  97.28,97.28 180 top
U$1  [HIGH_PERFORMANCE11]  19.3,18.16 0 bottom
U$2  [#SCL#6]  19.56,30.61 270 top
U$3  [#3#3V#0]  22.1,30.61 270 top
U$4  [#GND#4]  24.64,30.61 270 top
U$5  [#SDA#5]  17.02,30.61 270 top
U$6  [#CIPO#11]  20.83,8.51 270 top
U$7  [#INT#7]  14.48,30.61 270 top
U$8  [PWR9]  9.4,24.64 0 top
U$9  [#COPI#12]  18.29,8.51 270 top
U$10  [HIGH_PERFORMANCE11]  19.56,16.89 0 top
U$11  [MAGNETOMETER12]  19.56,15.37 0 top
U$12  [#3#3V#0]  22.1,30.61 270 bottom
U$13  [#GND#4]  24.64,30.61 270 bottom
U$14  [#SCK#13]  23.37,8.51 270 top
U$15  [##CS##10]  25.91,8.51 270 top
U$16  [#INT#7]  14.48,30.61 270 bottom
U$17  [#GND#4]  13.21,12.95 270 top
U$18  [#3#3V#0]  15.75,13.34 270 top
U$19  [Y16]  27.94,14.86 0 top
U$20  [X15]  31.24,12.95 0 top
U$21  [#LED#8]  14.48,22.86 0 bottom
U$22  [#I2C#9]  19.56,22.86 0 bottom
U$23  [#SPI#9]  27.18,22.86 0 bottom
U$24  [MAGNETOMETER12]  19.56,16.89 0 bottom
U$25  [X15]  31.5,18.29 0 bottom
U$26  [Y16]  28.96,21.34 0 bottom
U$27  [Z17]  26.92,16.89 0 bottom
U$28  [#GND#4]  13.21,12.95 270 bottom
U$29  [#3#3V#0]  15.75,13.34 270 bottom
U$30  [#COPI#12]  18.29,8.51 270 bottom
U$31  [#CIPO#11]  20.83,8.51 270 bottom
U$32  [#SCK#13]  23.37,8.51 270 bottom
U$33  [##CS##10]  25.91,8.51 270 bottom
U$34  [MADE_IN_THE_USA20]  19.56,14.73 0 bottom
U$35  [#SCL#6]  19.56,30.61 270 bottom
U$36  SPARKX-LOGO2  [SPARKX-TINY]  9.91,12.7 0 top
U$37  SPARKX-LOGO3  [SPARKX-SMALL]  19.81,20.83 0 bottom
U$38  [#SDA#5]  17.02,30.61 270 bottom
U$39  [Z17]  27.56,11.68 0 top
U$40  [#3#3V#0]  48.01,30.61 270 top
U$41  [#GND#4]  50.55,30.61 270 top
U$42  [#INT#7]  40.39,30.61 270 top
U$43  [PWR9]  35.31,24.64 0 top
U$44  [HIGH_PERFORMANCE11]  45.47,16.89 0 top
U$45  [MAGNETOMETER12]  45.47,15.37 0 top
U$46  [#3#3V#0]  48.01,30.61 270 bottom
U$47  [#GND#4]  50.55,30.61 270 bottom
U$48  [#INT#7]  40.39,30.61 270 bottom
U$49  [#LED#8]  40.39,22.86 0 bottom
U$50  [#I2C#9]  45.47,22.86 0 bottom
U$51  [#SPI#9]  53.09,22.86 0 bottom
U$52  [#SCL#6]  45.47,30.61 270 top
U$53  [#SDA#5]  42.93,30.61 270 top
U$54  [#CIPO#11]  46.74,8.51 270 top
U$55  [#COPI#12]  44.2,8.51 270 top
U$56  [#SCK#13]  49.28,8.51 270 top
U$57  [##CS##10]  51.82,8.51 270 top
U$58  [#3#3V#0]  41.66,13.34 270 top
U$59  [Y16]  53.85,14.86 0 top
U$60  [X15]  57.15,12.95 0 top
U$61  [X15]  57.4,18.29 0 bottom
U$62  [Y16]  54.86,21.34 0 bottom
U$63  [Z17]  52.83,16.89 0 bottom
U$64  [#GND#4]  39.12,12.95 270 top
U$65  [HIGH_PERFORMANCE11]  45.21,18.16 0 bottom
U$66  [MAGNETOMETER12]  45.47,16.89 0 bottom
U$67  [#GND#4]  39.12,12.95 270 bottom
U$68  [#3#3V#0]  41.66,13.34 270 bottom
U$69  [#COPI#12]  44.2,8.51 270 bottom
U$70  [#CIPO#11]  46.74,8.51 270 bottom
U$71  [#SCK#13]  49.28,8.51 270 bottom
U$72  [##CS##10]  51.82,8.51 270 bottom
U$73  SPARKX-LOGO2  [SPARKX-TINY]  35.81,12.7 0 top
U$74  SPARKX-LOGO3  [SPARKX-SMALL]  45.72,20.83 0 bottom
U$75  [MADE_IN_THE_USA20]  45.47,14.73 0 bottom
U$76  [#SCL#6]  45.47,30.61 270 bottom
U$77  [#SDA#5]  42.93,30.61 270 bottom
U$78  [Z17]  53.47,11.68 0 top
U$79  [#3#3V#0]  73.91,30.61 270 top
U$80  [#GND#4]  76.45,30.61 270 top
U$81  [#INT#7]  66.29,30.61 270 top
U$82  [PWR9]  61.21,24.64 0 top
U$83  [HIGH_PERFORMANCE11]  71.37,16.89 0 top
U$84  [MAGNETOMETER12]  71.37,15.37 0 top
U$85  [#3#3V#0]  73.91,30.61 270 bottom
U$86  [#GND#4]  76.45,30.61 270 bottom
U$87  [#INT#7]  66.29,30.61 270 bottom
U$88  [#LED#8]  66.29,22.86 0 bottom
U$89  [#I2C#9]  71.37,22.86 0 bottom
U$90  [#SPI#9]  78.99,22.86 0 bottom
U$91  [#SCL#6]  71.37,30.61 270 top
U$92  [#SDA#5]  68.83,30.61 270 top
U$93  [#CIPO#11]  72.64,8.51 270 top
U$94  [#COPI#12]  70.1,8.51 270 top
U$95  [#SCK#13]  75.18,8.51 270 top
U$96  [##CS##10]  77.72,8.51 270 top
U$97  [#3#3V#0]  67.56,13.34 270 top
U$98  [Y16]  79.76,14.86 0 top
U$99  [X15]  83.06,12.95 0 top
U$100  [X15]  83.31,18.29 0 bottom
U$101  [Y16]  80.77,21.34 0 bottom
U$102  [Z17]  78.74,16.89 0 bottom
U$103  [#GND#4]  65.02,12.95 270 top
U$104  [HIGH_PERFORMANCE11]  71.12,18.16 0 bottom
U$105  [MAGNETOMETER12]  71.37,16.89 0 bottom
U$106  [#GND#4]  65.02,12.95 270 bottom
U$107  [#3#3V#0]  67.56,13.34 270 bottom
U$108  [#COPI#12]  70.1,8.51 270 bottom
U$109  [#CIPO#11]  72.64,8.51 270 bottom
U$110  [#SCK#13]  75.18,8.51 270 bottom
U$111  [##CS##10]  77.72,8.51 270 bottom
U$112  SPARKX-LOGO2  [SPARKX-TINY]  61.72,12.7 0 top
U$113  SPARKX-LOGO3  [SPARKX-SMALL]  71.63,20.83 0 bottom
U$114  [MADE_IN_THE_USA20]  71.37,14.73 0 bottom
U$115  [#SCL#6]  71.37,30.61 270 bottom
U$116  [#SDA#5]  68.83,30.61 270 bottom
U$117  [Z17]  79.38,11.68 0 top
U$118  [#3#3V#0]  99.82,30.61 270 top
U$119  [#GND#4]  102.36,30.61 270 top
U$120  [#INT#7]  92.2,30.61 270 top
U$121  [PWR9]  87.12,24.64 0 top
U$122  [HIGH_PERFORMANCE11]  97.28,16.89 0 top
U$123  [MAGNETOMETER12]  97.28,15.37 0 top
U$124  [#3#3V#0]  99.82,30.61 270 bottom
U$125  [#GND#4]  102.36,30.61 270 bottom
U$126  [#INT#7]  92.2,30.61 270 bottom
U$127  [#LED#8]  92.2,22.86 0 bottom
U$128  [#I2C#9]  97.28,22.86 0 bottom
U$129  [#SPI#9]  104.9,22.86 0 bottom
U$130  [#SCL#6]  97.28,30.61 270 top
U$131  [#SDA#5]  94.74,30.61 270 top
U$132  [#CIPO#11]  98.55,8.51 270 top
U$133  [#COPI#12]  96.01,8.51 270 top
U$134  [#SCK#13]  101.09,8.51 270 top
U$135  [##CS##10]  103.63,8.51 270 top
U$136  [#3#3V#0]  93.47,13.34 270 top
U$137  [Y16]  105.66,14.86 0 top
U$138  [X15]  108.97,12.95 0 top
U$139  [X15]  109.22,18.29 0 bottom
U$140  [Y16]  106.68,21.34 0 bottom
U$141  [Z17]  104.65,16.89 0 bottom
U$142  [#GND#4]  90.93,12.95 270 top
U$143  [HIGH_PERFORMANCE11]  97.03,18.16 0 bottom
U$144  [MAGNETOMETER12]  97.28,16.89 0 bottom
U$145  [#GND#4]  90.93,12.95 270 bottom
U$146  [#3#3V#0]  93.47,13.34 270 bottom
U$147  [#COPI#12]  96.01,8.51 270 bottom
U$148  [#CIPO#11]  98.55,8.51 270 bottom
U$149  [#SCK#13]  101.09,8.51 270 bottom
U$150  [##CS##10]  103.63,8.51 270 bottom
U$151  SPARKX-LOGO2  [SPARKX-TINY]  87.63,12.7 0 top
U$152  SPARKX-LOGO3  [SPARKX-SMALL]  97.54,20.83 0 bottom
U$153  [MADE_IN_THE_USA20]  97.28,14.73 0 bottom
U$154  [#SCL#6]  97.28,30.61 270 bottom
U$155  [#SDA#5]  94.74,30.61 270 bottom
U$156  [Z17]  105.28,11.68 0 top
U$157  [#3#3V#0]  22.1,56.51 270 top
U$158  [#GND#4]  24.64,56.51 270 top
U$159  [#INT#7]  14.48,56.51 270 top
U$160  [PWR9]  9.4,50.55 0 top
U$161  [HIGH_PERFORMANCE11]  19.56,42.8 0 top
U$162  [MAGNETOMETER12]  19.56,41.27 0 top
U$163  [#3#3V#0]  22.1,56.51 270 bottom
U$164  [#GND#4]  24.64,56.51 270 bottom
U$165  [#INT#7]  14.48,56.51 270 bottom
U$166  [#LED#8]  14.48,48.77 0 bottom
U$167  [#I2C#9]  19.56,48.77 0 bottom
U$168  [#SPI#9]  27.18,48.77 0 bottom
U$169  [#SCL#6]  19.56,56.51 270 top
U$170  [#SDA#5]  17.02,56.51 270 top
U$171  [#CIPO#11]  20.83,34.42 270 top
U$172  [#COPI#12]  18.29,34.42 270 top
U$173  [#SCK#13]  23.37,34.42 270 top
U$174  [##CS##10]  25.91,34.42 270 top
U$175  [#3#3V#0]  15.75,39.24 270 top
U$176  [Y16]  27.94,40.77 0 top
U$177  [X15]  31.24,38.86 0 top
U$178  [X15]  31.5,44.2 0 bottom
U$179  [Y16]  28.96,47.24 0 bottom
U$180  [Z17]  26.92,42.8 0 bottom
U$181  [#GND#4]  13.21,38.86 270 top
U$182  [HIGH_PERFORMANCE11]  19.3,44.07 0 bottom
U$183  [MAGNETOMETER12]  19.56,42.8 0 bottom
U$184  [#GND#4]  13.21,38.86 270 bottom
U$185  [#3#3V#0]  15.75,39.24 270 bottom
U$186  [#COPI#12]  18.29,34.42 270 bottom
U$187  [#CIPO#11]  20.83,34.42 270 bottom
U$188  [#SCK#13]  23.37,34.42 270 bottom
U$189  [##CS##10]  25.91,34.42 270 bottom
U$190  SPARKX-LOGO2  [SPARKX-TINY]  9.91,38.61 0 top
U$191  SPARKX-LOGO3  [SPARKX-SMALL]  19.81,46.74 0 bottom
U$192  [MADE_IN_THE_USA20]  19.56,40.64 0 bottom
U$193  [#SCL#6]  19.56,56.51 270 bottom
U$194  [#SDA#5]  17.02,56.51 270 bottom
U$195  [Z17]  27.56,37.59 0 top
U$196  [#3#3V#0]  48.01,56.51 270 top
U$197  [#GND#4]  50.55,56.51 270 top
U$198  [#INT#7]  40.39,56.51 270 top
U$199  [PWR9]  35.31,50.55 0 top
U$200  [HIGH_PERFORMANCE11]  45.47,42.8 0 top
U$201  [MAGNETOMETER12]  45.47,41.27 0 top
U$202  [#3#3V#0]  48.01,56.51 270 bottom
U$203  [#GND#4]  50.55,56.51 270 bottom
U$204  [#INT#7]  40.39,56.51 270 bottom
U$205  [#LED#8]  40.39,48.77 0 bottom
U$206  [#I2C#9]  45.47,48.77 0 bottom
U$207  [#SPI#9]  53.09,48.77 0 bottom
U$208  [#SCL#6]  45.47,56.51 270 top
U$209  [#SDA#5]  42.93,56.51 270 top
U$210  [#CIPO#11]  46.74,34.42 270 top
U$211  [#COPI#12]  44.2,34.42 270 top
U$212  [#SCK#13]  49.28,34.42 270 top
U$213  [##CS##10]  51.82,34.42 270 top
U$214  [#3#3V#0]  41.66,39.24 270 top
U$215  [Y16]  53.85,40.77 0 top
U$216  [X15]  57.15,38.86 0 top
U$217  [X15]  57.4,44.2 0 bottom
U$218  [Y16]  54.86,47.24 0 bottom
U$219  [Z17]  52.83,42.8 0 bottom
U$220  [#GND#4]  39.12,38.86 270 top
U$221  [HIGH_PERFORMANCE11]  45.21,44.07 0 bottom
U$222  [MAGNETOMETER12]  45.47,42.8 0 bottom
U$223  [#GND#4]  39.12,38.86 270 bottom
U$224  [#3#3V#0]  41.66,39.24 270 bottom
U$225  [#COPI#12]  44.2,34.42 270 bottom
U$226  [#CIPO#11]  46.74,34.42 270 bottom
U$227  [#SCK#13]  49.28,34.42 270 bottom
U$228  [##CS##10]  51.82,34.42 270 bottom
U$229  SPARKX-LOGO2  [SPARKX-TINY]  35.81,38.61 0 top
U$230  SPARKX-LOGO3  [SPARKX-SMALL]  45.72,46.74 0 bottom
U$231  [MADE_IN_THE_USA20]  45.47,40.64 0 bottom
U$232  [#SCL#6]  45.47,56.51 270 bottom
U$233  [#SDA#5]  42.93,56.51 270 bottom
U$234  [Z17]  53.47,37.59 0 top
U$235  [#3#3V#0]  73.91,56.51 270 top
U$236  [#GND#4]  76.45,56.51 270 top
U$237  [#INT#7]  66.29,56.51 270 top
U$238  [PWR9]  61.21,50.55 0 top
U$239  [HIGH_PERFORMANCE11]  71.37,42.8 0 top
U$240  [MAGNETOMETER12]  71.37,41.27 0 top
U$241  [#3#3V#0]  73.91,56.51 270 bottom
U$242  [#GND#4]  76.45,56.51 270 bottom
U$243  [#INT#7]  66.29,56.51 270 bottom
U$244  [#LED#8]  66.29,48.77 0 bottom
U$245  [#I2C#9]  71.37,48.77 0 bottom
U$246  [#SPI#9]  78.99,48.77 0 bottom
U$247  [#SCL#6]  71.37,56.51 270 top
U$248  [#SDA#5]  68.83,56.51 270 top
U$249  [#CIPO#11]  72.64,34.42 270 top
U$250  [#COPI#12]  70.1,34.42 270 top
U$251  [#SCK#13]  75.18,34.42 270 top
U$252  [##CS##10]  77.72,34.42 270 top
U$253  [#3#3V#0]  67.56,39.24 270 top
U$254  [Y16]  79.76,40.77 0 top
U$255  [X15]  83.06,38.86 0 top
U$256  [X15]  83.31,44.2 0 bottom
U$257  [Y16]  80.77,47.24 0 bottom
U$258  [Z17]  78.74,42.8 0 bottom
U$259  [#GND#4]  65.02,38.86 270 top
U$260  [HIGH_PERFORMANCE11]  71.12,44.07 0 bottom
U$261  [MAGNETOMETER12]  71.37,42.8 0 bottom
U$262  [#GND#4]  65.02,38.86 270 bottom
U$263  [#3#3V#0]  67.56,39.24 270 bottom
U$264  [#COPI#12]  70.1,34.42 270 bottom
U$265  [#CIPO#11]  72.64,34.42 270 bottom
U$266  [#SCK#13]  75.18,34.42 270 bottom
U$267  [##CS##10]  77.72,34.42 270 bottom
U$268  SPARKX-LOGO2  [SPARKX-TINY]  61.72,38.61 0 top
U$269  SPARKX-LOGO3  [SPARKX-SMALL]  71.63,46.74 0 bottom
U$270  [MADE_IN_THE_USA20]  71.37,40.64 0 bottom
U$271  [#SCL#6]  71.37,56.51 270 bottom
U$272  [#SDA#5]  68.83,56.51 270 bottom
U$273  [Z17]  79.38,37.59 0 top
U$274  [#3#3V#0]  99.82,56.51 270 top
U$275  [#GND#4]  102.36,56.51 270 top
U$276  [#INT#7]  92.2,56.51 270 top
U$277  [PWR9]  87.12,50.55 0 top
U$278  [HIGH_PERFORMANCE11]  97.28,42.8 0 top
U$279  [MAGNETOMETER12]  97.28,41.27 0 top
U$280  [#3#3V#0]  99.82,56.51 270 bottom
U$281  [#GND#4]  102.36,56.51 270 bottom
U$282  [#INT#7]  92.2,56.51 270 bottom
U$283  [#LED#8]  92.2,48.77 0 bottom
U$284  [#I2C#9]  97.28,48.77 0 bottom
U$285  [#SPI#9]  104.9,48.77 0 bottom
U$286  [#SCL#6]  97.28,56.51 270 top
U$287  [#SDA#5]  94.74,56.51 270 top
U$288  [#CIPO#11]  98.55,34.42 270 top
U$289  [#COPI#12]  96.01,34.42 270 top
U$290  [#SCK#13]  101.09,34.42 270 top
U$291  [##CS##10]  103.63,34.42 270 top
U$292  [#3#3V#0]  93.47,39.24 270 top
U$293  [Y16]  105.66,40.77 0 top
U$294  [X15]  108.97,38.86 0 top
U$295  [X15]  109.22,44.2 0 bottom
U$296  [Y16]  106.68,47.24 0 bottom
U$297  [Z17]  104.65,42.8 0 bottom
U$298  [#GND#4]  90.93,38.86 270 top
U$299  [HIGH_PERFORMANCE11]  97.03,44.07 0 bottom
U$300  [MAGNETOMETER12]  97.28,42.8 0 bottom
U$301  [#GND#4]  90.93,38.86 270 bottom
U$302  [#3#3V#0]  93.47,39.24 270 bottom
U$303  [#COPI#12]  96.01,34.42 270 bottom
U$304  [#CIPO#11]  98.55,34.42 270 bottom
U$305  [#SCK#13]  101.09,34.42 270 bottom
U$306  [##CS##10]  103.63,34.42 270 bottom
U$307  SPARKX-LOGO2  [SPARKX-TINY]  87.63,38.61 0 top
U$308  SPARKX-LOGO3  [SPARKX-SMALL]  97.54,46.74 0 bottom
U$309  [MADE_IN_THE_USA20]  97.28,40.64 0 bottom
U$310  [#SCL#6]  97.28,56.51 270 bottom
U$311  [#SDA#5]  94.74,56.51 270 bottom
U$312  [Z17]  105.28,37.59 0 top
U$313  [#3#3V#0]  22.1,82.42 270 top
U$314  [#GND#4]  24.64,82.42 270 top
U$315  [#INT#7]  14.48,82.42 270 top
U$316  [PWR9]  9.4,76.45 0 top
U$317  [HIGH_PERFORMANCE11]  19.56,68.71 0 top
U$318  [MAGNETOMETER12]  19.56,67.18 0 top
U$319  [#3#3V#0]  22.1,82.42 270 bottom
U$320  [#GND#4]  24.64,82.42 270 bottom
U$321  [#INT#7]  14.48,82.42 270 bottom
U$322  [#LED#8]  14.48,74.68 0 bottom
U$323  [#I2C#9]  19.56,74.68 0 bottom
U$324  [#SPI#9]  27.18,74.68 0 bottom
U$325  [#SCL#6]  19.56,82.42 270 top
U$326  [#SDA#5]  17.02,82.42 270 top
U$327  [#CIPO#11]  20.83,60.32 270 top
U$328  [#COPI#12]  18.29,60.32 270 top
U$329  [#SCK#13]  23.37,60.32 270 top
U$330  [##CS##10]  25.91,60.32 270 top
U$331  [#3#3V#0]  15.75,65.15 270 top
U$332  [Y16]  27.94,66.67 0 top
U$333  [X15]  31.24,64.77 0 top
U$334  [X15]  31.5,70.1 0 bottom
U$335  [Y16]  28.96,73.15 0 bottom
U$336  [Z17]  26.92,68.71 0 bottom
U$337  [#GND#4]  13.21,64.77 270 top
U$338  [HIGH_PERFORMANCE11]  19.3,69.98 0 bottom
U$339  [MAGNETOMETER12]  19.56,68.71 0 bottom
U$340  [#GND#4]  13.21,64.77 270 bottom
U$341  [#3#3V#0]  15.75,65.15 270 bottom
U$342  [#COPI#12]  18.29,60.32 270 bottom
U$343  [#CIPO#11]  20.83,60.32 270 bottom
U$344  [#SCK#13]  23.37,60.32 270 bottom
U$345  [##CS##10]  25.91,60.32 270 bottom
U$346  SPARKX-LOGO2  [SPARKX-TINY]  9.91,64.52 0 top
U$347  SPARKX-LOGO3  [SPARKX-SMALL]  19.81,72.64 0 bottom
U$348  [MADE_IN_THE_USA20]  19.56,66.55 0 bottom
U$349  [#SCL#6]  19.56,82.42 270 bottom
U$350  [#SDA#5]  17.02,82.42 270 bottom
U$351  [Z17]  27.56,63.5 0 top
U$352  [#3#3V#0]  48.01,82.42 270 top
U$353  [#GND#4]  50.55,82.42 270 top
U$354  [#INT#7]  40.39,82.42 270 top
U$355  [PWR9]  35.31,76.45 0 top
U$356  [HIGH_PERFORMANCE11]  45.47,68.71 0 top
U$357  [MAGNETOMETER12]  45.47,67.18 0 top
U$358  [#3#3V#0]  48.01,82.42 270 bottom
U$359  [#GND#4]  50.55,82.42 270 bottom
U$360  [#INT#7]  40.39,82.42 270 bottom
U$361  [#LED#8]  40.39,74.68 0 bottom
U$362  [#I2C#9]  45.47,74.68 0 bottom
U$363  [#SPI#9]  53.09,74.68 0 bottom
U$364  [#SCL#6]  45.47,82.42 270 top
U$365  [#SDA#5]  42.93,82.42 270 top
U$366  [#CIPO#11]  46.74,60.32 270 top
U$367  [#COPI#12]  44.2,60.32 270 top
U$368  [#SCK#13]  49.28,60.32 270 top
U$369  [##CS##10]  51.82,60.32 270 top
U$370  [#3#3V#0]  41.66,65.15 270 top
U$371  [Y16]  53.85,66.67 0 top
U$372  [X15]  57.15,64.77 0 top
U$373  [X15]  57.4,70.1 0 bottom
U$374  [Y16]  54.86,73.15 0 bottom
U$375  [Z17]  52.83,68.71 0 bottom
U$376  [#GND#4]  39.12,64.77 270 top
U$377  [HIGH_PERFORMANCE11]  45.21,69.98 0 bottom
U$378  [MAGNETOMETER12]  45.47,68.71 0 bottom
U$379  [#GND#4]  39.12,64.77 270 bottom
U$380  [#3#3V#0]  41.66,65.15 270 bottom
U$381  [#COPI#12]  44.2,60.32 270 bottom
U$382  [#CIPO#11]  46.74,60.32 270 bottom
U$383  [#SCK#13]  49.28,60.32 270 bottom
U$384  [##CS##10]  51.82,60.32 270 bottom
U$385  SPARKX-LOGO2  [SPARKX-TINY]  35.81,64.52 0 top
U$386  SPARKX-LOGO3  [SPARKX-SMALL]  45.72,72.64 0 bottom
U$387  [MADE_IN_THE_USA20]  45.47,66.55 0 bottom
U$388  [#SCL#6]  45.47,82.42 270 bottom
U$389  [#SDA#5]  42.93,82.42 270 bottom
U$390  [Z17]  53.47,63.5 0 top
U$391  [#3#3V#0]  73.91,82.42 270 top
U$392  [#GND#4]  76.45,82.42 270 top
U$393  [#INT#7]  66.29,82.42 270 top
U$394  [PWR9]  61.21,76.45 0 top
U$395  [HIGH_PERFORMANCE11]  71.37,68.71 0 top
U$396  [MAGNETOMETER12]  71.37,67.18 0 top
U$397  [#3#3V#0]  73.91,82.42 270 bottom
U$398  [#GND#4]  76.45,82.42 270 bottom
U$399  [#INT#7]  66.29,82.42 270 bottom
U$400  [#LED#8]  66.29,74.68 0 bottom
U$401  [#I2C#9]  71.37,74.68 0 bottom
U$402  [#SPI#9]  78.99,74.68 0 bottom
U$403  [#SCL#6]  71.37,82.42 270 top
U$404  [#SDA#5]  68.83,82.42 270 top
U$405  [#CIPO#11]  72.64,60.32 270 top
U$406  [#COPI#12]  70.1,60.32 270 top
U$407  [#SCK#13]  75.18,60.32 270 top
U$408  [##CS##10]  77.72,60.32 270 top
U$409  [#3#3V#0]  67.56,65.15 270 top
U$410  [Y16]  79.76,66.67 0 top
U$411  [X15]  83.06,64.77 0 top
U$412  [X15]  83.31,70.1 0 bottom
U$413  [Y16]  80.77,73.15 0 bottom
U$414  [Z17]  78.74,68.71 0 bottom
U$415  [#GND#4]  65.02,64.77 270 top
U$416  [HIGH_PERFORMANCE11]  71.12,69.98 0 bottom
U$417  [MAGNETOMETER12]  71.37,68.71 0 bottom
U$418  [#GND#4]  65.02,64.77 270 bottom
U$419  [#3#3V#0]  67.56,65.15 270 bottom
U$420  [#COPI#12]  70.1,60.32 270 bottom
U$421  [#CIPO#11]  72.64,60.32 270 bottom
U$422  [#SCK#13]  75.18,60.32 270 bottom
U$423  [##CS##10]  77.72,60.32 270 bottom
U$424  SPARKX-LOGO2  [SPARKX-TINY]  61.72,64.52 0 top
U$425  SPARKX-LOGO3  [SPARKX-SMALL]  71.63,72.64 0 bottom
U$426  [MADE_IN_THE_USA20]  71.37,66.55 0 bottom
U$427  [#SCL#6]  71.37,82.42 270 bottom
U$428  [#SDA#5]  68.83,82.42 270 bottom
U$429  [Z17]  79.38,63.5 0 top
U$430  [#3#3V#0]  99.82,82.42 270 top
U$431  [#GND#4]  102.36,82.42 270 top
U$432  [#INT#7]  92.2,82.42 270 top
U$433  [PWR9]  87.12,76.45 0 top
U$434  [HIGH_PERFORMANCE11]  97.28,68.71 0 top
U$435  [MAGNETOMETER12]  97.28,67.18 0 top
U$436  [#3#3V#0]  99.82,82.42 270 bottom
U$437  [#GND#4]  102.36,82.42 270 bottom
U$438  [#INT#7]  92.2,82.42 270 bottom
U$439  [#LED#8]  92.2,74.68 0 bottom
U$440  [#I2C#9]  97.28,74.68 0 bottom
U$441  [#SPI#9]  104.9,74.68 0 bottom
U$442  [#SCL#6]  97.28,82.42 270 top
U$443  [#SDA#5]  94.74,82.42 270 top
U$444  [#CIPO#11]  98.55,60.32 270 top
U$445  [#COPI#12]  96.01,60.32 270 top
U$446  [#SCK#13]  101.09,60.32 270 top
U$447  [##CS##10]  103.63,60.32 270 top
U$448  [#3#3V#0]  93.47,65.15 270 top
U$449  [Y16]  105.66,66.67 0 top
U$450  [X15]  108.97,64.77 0 top
U$451  [X15]  109.22,70.1 0 bottom
U$452  [Y16]  106.68,73.15 0 bottom
U$453  [Z17]  104.65,68.71 0 bottom
U$454  [#GND#4]  90.93,64.77 270 top
U$455  [HIGH_PERFORMANCE11]  97.03,69.98 0 bottom
U$456  [MAGNETOMETER12]  97.28,68.71 0 bottom
U$457  [#GND#4]  90.93,64.77 270 bottom
U$458  [#3#3V#0]  93.47,65.15 270 bottom
U$459  [#COPI#12]  96.01,60.32 270 bottom
U$460  [#CIPO#11]  98.55,60.32 270 bottom
U$461  [#SCK#13]  101.09,60.32 270 bottom
U$462  [##CS##10]  103.63,60.32 270 bottom
U$463  SPARKX-LOGO2  [SPARKX-TINY]  87.63,64.52 0 top
U$464  SPARKX-LOGO3  [SPARKX-SMALL]  97.54,72.64 0 bottom
U$465  [MADE_IN_THE_USA20]  97.28,66.55 0 bottom
U$466  [#SCL#6]  97.28,82.42 270 bottom
U$467  [#SDA#5]  94.74,82.42 270 bottom
U$468  [Z17]  105.28,63.5 0 top
U$469  [#3#3V#0]  22.1,108.33 270 top
U$470  [#GND#4]  24.64,108.33 270 top
U$471  [#INT#7]  14.48,108.33 270 top
U$472  [PWR9]  9.4,102.36 0 top
U$473  [HIGH_PERFORMANCE11]  19.56,94.62 0 top
U$474  [MAGNETOMETER12]  19.56,93.09 0 top
U$475  [#3#3V#0]  22.1,108.33 270 bottom
U$476  [#GND#4]  24.64,108.33 270 bottom
U$477  [#INT#7]  14.48,108.33 270 bottom
U$478  [#LED#8]  14.48,100.58 0 bottom
U$479  [#I2C#9]  19.56,100.58 0 bottom
U$480  [#SPI#9]  27.18,100.58 0 bottom
U$481  [#SCL#6]  19.56,108.33 270 top
U$482  [#SDA#5]  17.02,108.33 270 top
U$483  [#CIPO#11]  20.83,86.23 270 top
U$484  [#COPI#12]  18.29,86.23 270 top
U$485  [#SCK#13]  23.37,86.23 270 top
U$486  [##CS##10]  25.91,86.23 270 top
U$487  [#3#3V#0]  15.75,91.06 270 top
U$488  [Y16]  27.94,92.58 0 top
U$489  [X15]  31.24,90.68 0 top
U$490  [X15]  31.5,96.01 0 bottom
U$491  [Y16]  28.96,99.06 0 bottom
U$492  [Z17]  26.92,94.62 0 bottom
U$493  [#GND#4]  13.21,90.68 270 top
U$494  [HIGH_PERFORMANCE11]  19.3,95.89 0 bottom
U$495  [MAGNETOMETER12]  19.56,94.62 0 bottom
U$496  [#GND#4]  13.21,90.68 270 bottom
U$497  [#3#3V#0]  15.75,91.06 270 bottom
U$498  [#COPI#12]  18.29,86.23 270 bottom
U$499  [#CIPO#11]  20.83,86.23 270 bottom
U$500  [#SCK#13]  23.37,86.23 270 bottom
U$501  [##CS##10]  25.91,86.23 270 bottom
U$502  SPARKX-LOGO2  [SPARKX-TINY]  9.91,90.42 0 top
U$503  SPARKX-LOGO3  [SPARKX-SMALL]  19.81,98.55 0 bottom
U$504  [MADE_IN_THE_USA20]  19.56,92.46 0 bottom
U$505  [#SCL#6]  19.56,108.33 270 bottom
U$506  [#SDA#5]  17.02,108.33 270 bottom
U$507  [Z17]  27.56,89.41 0 top
U$508  [#3#3V#0]  48.01,108.33 270 top
U$509  [#GND#4]  50.55,108.33 270 top
U$510  [#INT#7]  40.39,108.33 270 top
U$511  [PWR9]  35.31,102.36 0 top
U$512  [HIGH_PERFORMANCE11]  45.47,94.62 0 top
U$513  [MAGNETOMETER12]  45.47,93.09 0 top
U$514  [#3#3V#0]  48.01,108.33 270 bottom
U$515  [#GND#4]  50.55,108.33 270 bottom
U$516  [#INT#7]  40.39,108.33 270 bottom
U$517  [#LED#8]  40.39,100.58 0 bottom
U$518  [#I2C#9]  45.47,100.58 0 bottom
U$519  [#SPI#9]  53.09,100.58 0 bottom
U$520  [#SCL#6]  45.47,108.33 270 top
U$521  [#SDA#5]  42.93,108.33 270 top
U$522  [#CIPO#11]  46.74,86.23 270 top
U$523  [#COPI#12]  44.2,86.23 270 top
U$524  [#SCK#13]  49.28,86.23 270 top
U$525  [##CS##10]  51.82,86.23 270 top
U$526  [#3#3V#0]  41.66,91.06 270 top
U$527  [Y16]  53.85,92.58 0 top
U$528  [X15]  57.15,90.68 0 top
U$529  [X15]  57.4,96.01 0 bottom
U$530  [Y16]  54.86,99.06 0 bottom
U$531  [Z17]  52.83,94.62 0 bottom
U$532  [#GND#4]  39.12,90.68 270 top
U$533  [HIGH_PERFORMANCE11]  45.21,95.89 0 bottom
U$534  [MAGNETOMETER12]  45.47,94.62 0 bottom
U$535  [#GND#4]  39.12,90.68 270 bottom
U$536  [#3#3V#0]  41.66,91.06 270 bottom
U$537  [#COPI#12]  44.2,86.23 270 bottom
U$538  [#CIPO#11]  46.74,86.23 270 bottom
U$539  [#SCK#13]  49.28,86.23 270 bottom
U$540  [##CS##10]  51.82,86.23 270 bottom
U$541  SPARKX-LOGO2  [SPARKX-TINY]  35.81,90.42 0 top
U$542  SPARKX-LOGO3  [SPARKX-SMALL]  45.72,98.55 0 bottom
U$543  [MADE_IN_THE_USA20]  45.47,92.46 0 bottom
U$544  [#SCL#6]  45.47,108.33 270 bottom
U$545  [#SDA#5]  42.93,108.33 270 bottom
U$546  [Z17]  53.47,89.41 0 top
U$547  [#3#3V#0]  73.91,108.33 270 top
U$548  [#GND#4]  76.45,108.33 270 top
U$549  [#INT#7]  66.29,108.33 270 top
U$550  [PWR9]  61.21,102.36 0 top
U$551  [HIGH_PERFORMANCE11]  71.37,94.62 0 top
U$552  [MAGNETOMETER12]  71.37,93.09 0 top
U$553  [#3#3V#0]  73.91,108.33 270 bottom
U$554  [#GND#4]  76.45,108.33 270 bottom
U$555  [#INT#7]  66.29,108.33 270 bottom
U$556  [#LED#8]  66.29,100.58 0 bottom
U$557  [#I2C#9]  71.37,100.58 0 bottom
U$558  [#SPI#9]  78.99,100.58 0 bottom
U$559  [#SCL#6]  71.37,108.33 270 top
U$560  [#SDA#5]  68.83,108.33 270 top
U$561  [#CIPO#11]  72.64,86.23 270 top
U$562  [#COPI#12]  70.1,86.23 270 top
U$563  [#SCK#13]  75.18,86.23 270 top
U$564  [##CS##10]  77.72,86.23 270 top
U$565  [#3#3V#0]  67.56,91.06 270 top
U$566  [Y16]  79.76,92.58 0 top
U$567  [X15]  83.06,90.68 0 top
U$568  [X15]  83.31,96.01 0 bottom
U$569  [Y16]  80.77,99.06 0 bottom
U$570  [Z17]  78.74,94.62 0 bottom
U$571  [#GND#4]  65.02,90.68 270 top
U$572  [HIGH_PERFORMANCE11]  71.12,95.89 0 bottom
U$573  [MAGNETOMETER12]  71.37,94.62 0 bottom
U$574  [#GND#4]  65.02,90.68 270 bottom
U$575  [#3#3V#0]  67.56,91.06 270 bottom
U$576  [#COPI#12]  70.1,86.23 270 bottom
U$577  [#CIPO#11]  72.64,86.23 270 bottom
U$578  [#SCK#13]  75.18,86.23 270 bottom
U$579  [##CS##10]  77.72,86.23 270 bottom
U$580  SPARKX-LOGO2  [SPARKX-TINY]  61.72,90.42 0 top
U$581  SPARKX-LOGO3  [SPARKX-SMALL]  71.63,98.55 0 bottom
U$582  [MADE_IN_THE_USA20]  71.37,92.46 0 bottom
U$583  [#SCL#6]  71.37,108.33 270 bottom
U$584  [#SDA#5]  68.83,108.33 270 bottom
U$585  [Z17]  79.38,89.41 0 top
U$586  [#3#3V#0]  99.82,108.33 270 top
U$587  [#GND#4]  102.36,108.33 270 top
U$588  [#INT#7]  92.2,108.33 270 top
U$589  [PWR9]  87.12,102.36 0 top
U$590  [HIGH_PERFORMANCE11]  97.28,94.62 0 top
U$591  [MAGNETOMETER12]  97.28,93.09 0 top
U$592  [#3#3V#0]  99.82,108.33 270 bottom
U$593  [#GND#4]  102.36,108.33 270 bottom
U$594  [#INT#7]  92.2,108.33 270 bottom
U$595  [#LED#8]  92.2,100.58 0 bottom
U$596  [#I2C#9]  97.28,100.58 0 bottom
U$597  [#SPI#9]  104.9,100.58 0 bottom
U$598  [#SCL#6]  97.28,108.33 270 top
U$599  [#SDA#5]  94.74,108.33 270 top
U$600  [#CIPO#11]  98.55,86.23 270 top
U$601  [#COPI#12]  96.01,86.23 270 top
U$602  [#SCK#13]  101.09,86.23 270 top
U$603  [##CS##10]  103.63,86.23 270 top
U$604  [#3#3V#0]  93.47,91.06 270 top
U$605  [Y16]  105.66,92.58 0 top
U$606  [X15]  108.97,90.68 0 top
U$607  [X15]  109.22,96.01 0 bottom
U$608  [Y16]  106.68,99.06 0 bottom
U$609  [Z17]  104.65,94.62 0 bottom
U$610  [#GND#4]  90.93,90.68 270 top
U$611  [HIGH_PERFORMANCE11]  97.03,95.89 0 bottom
U$612  [MAGNETOMETER12]  97.28,94.62 0 bottom
U$613  [#GND#4]  90.93,90.68 270 bottom
U$614  [#3#3V#0]  93.47,91.06 270 bottom
U$615  [#COPI#12]  96.01,86.23 270 bottom
U$616  [#CIPO#11]  98.55,86.23 270 bottom
U$617  [#SCK#13]  101.09,86.23 270 bottom
U$618  [##CS##10]  103.63,86.23 270 bottom
U$619  SPARKX-LOGO2  [SPARKX-TINY]  87.63,90.42 0 top
U$620  SPARKX-LOGO3  [SPARKX-SMALL]  97.54,98.55 0 bottom
U$621  [MADE_IN_THE_USA20]  97.28,92.46 0 bottom
U$622  [#SCL#6]  97.28,108.33 270 bottom
U$623  [#SDA#5]  94.74,108.33 270 bottom
U$624  [Z17]  105.28,89.41 0 top